# Altium PCB PCB.PcbDoc (part 2 of 2)
Units mm, origin at the board's own origin, x right, y up, seen from the top; angles counter-clockwise.
Board outline 82 x 200 mm, 4 copper layers (Top Layer, Signal Layer 1, Signal Layer 2, Bottom Layer), stack 0.778 mm thick; 206 components, 124 nets, 689 pads, 384 vias.
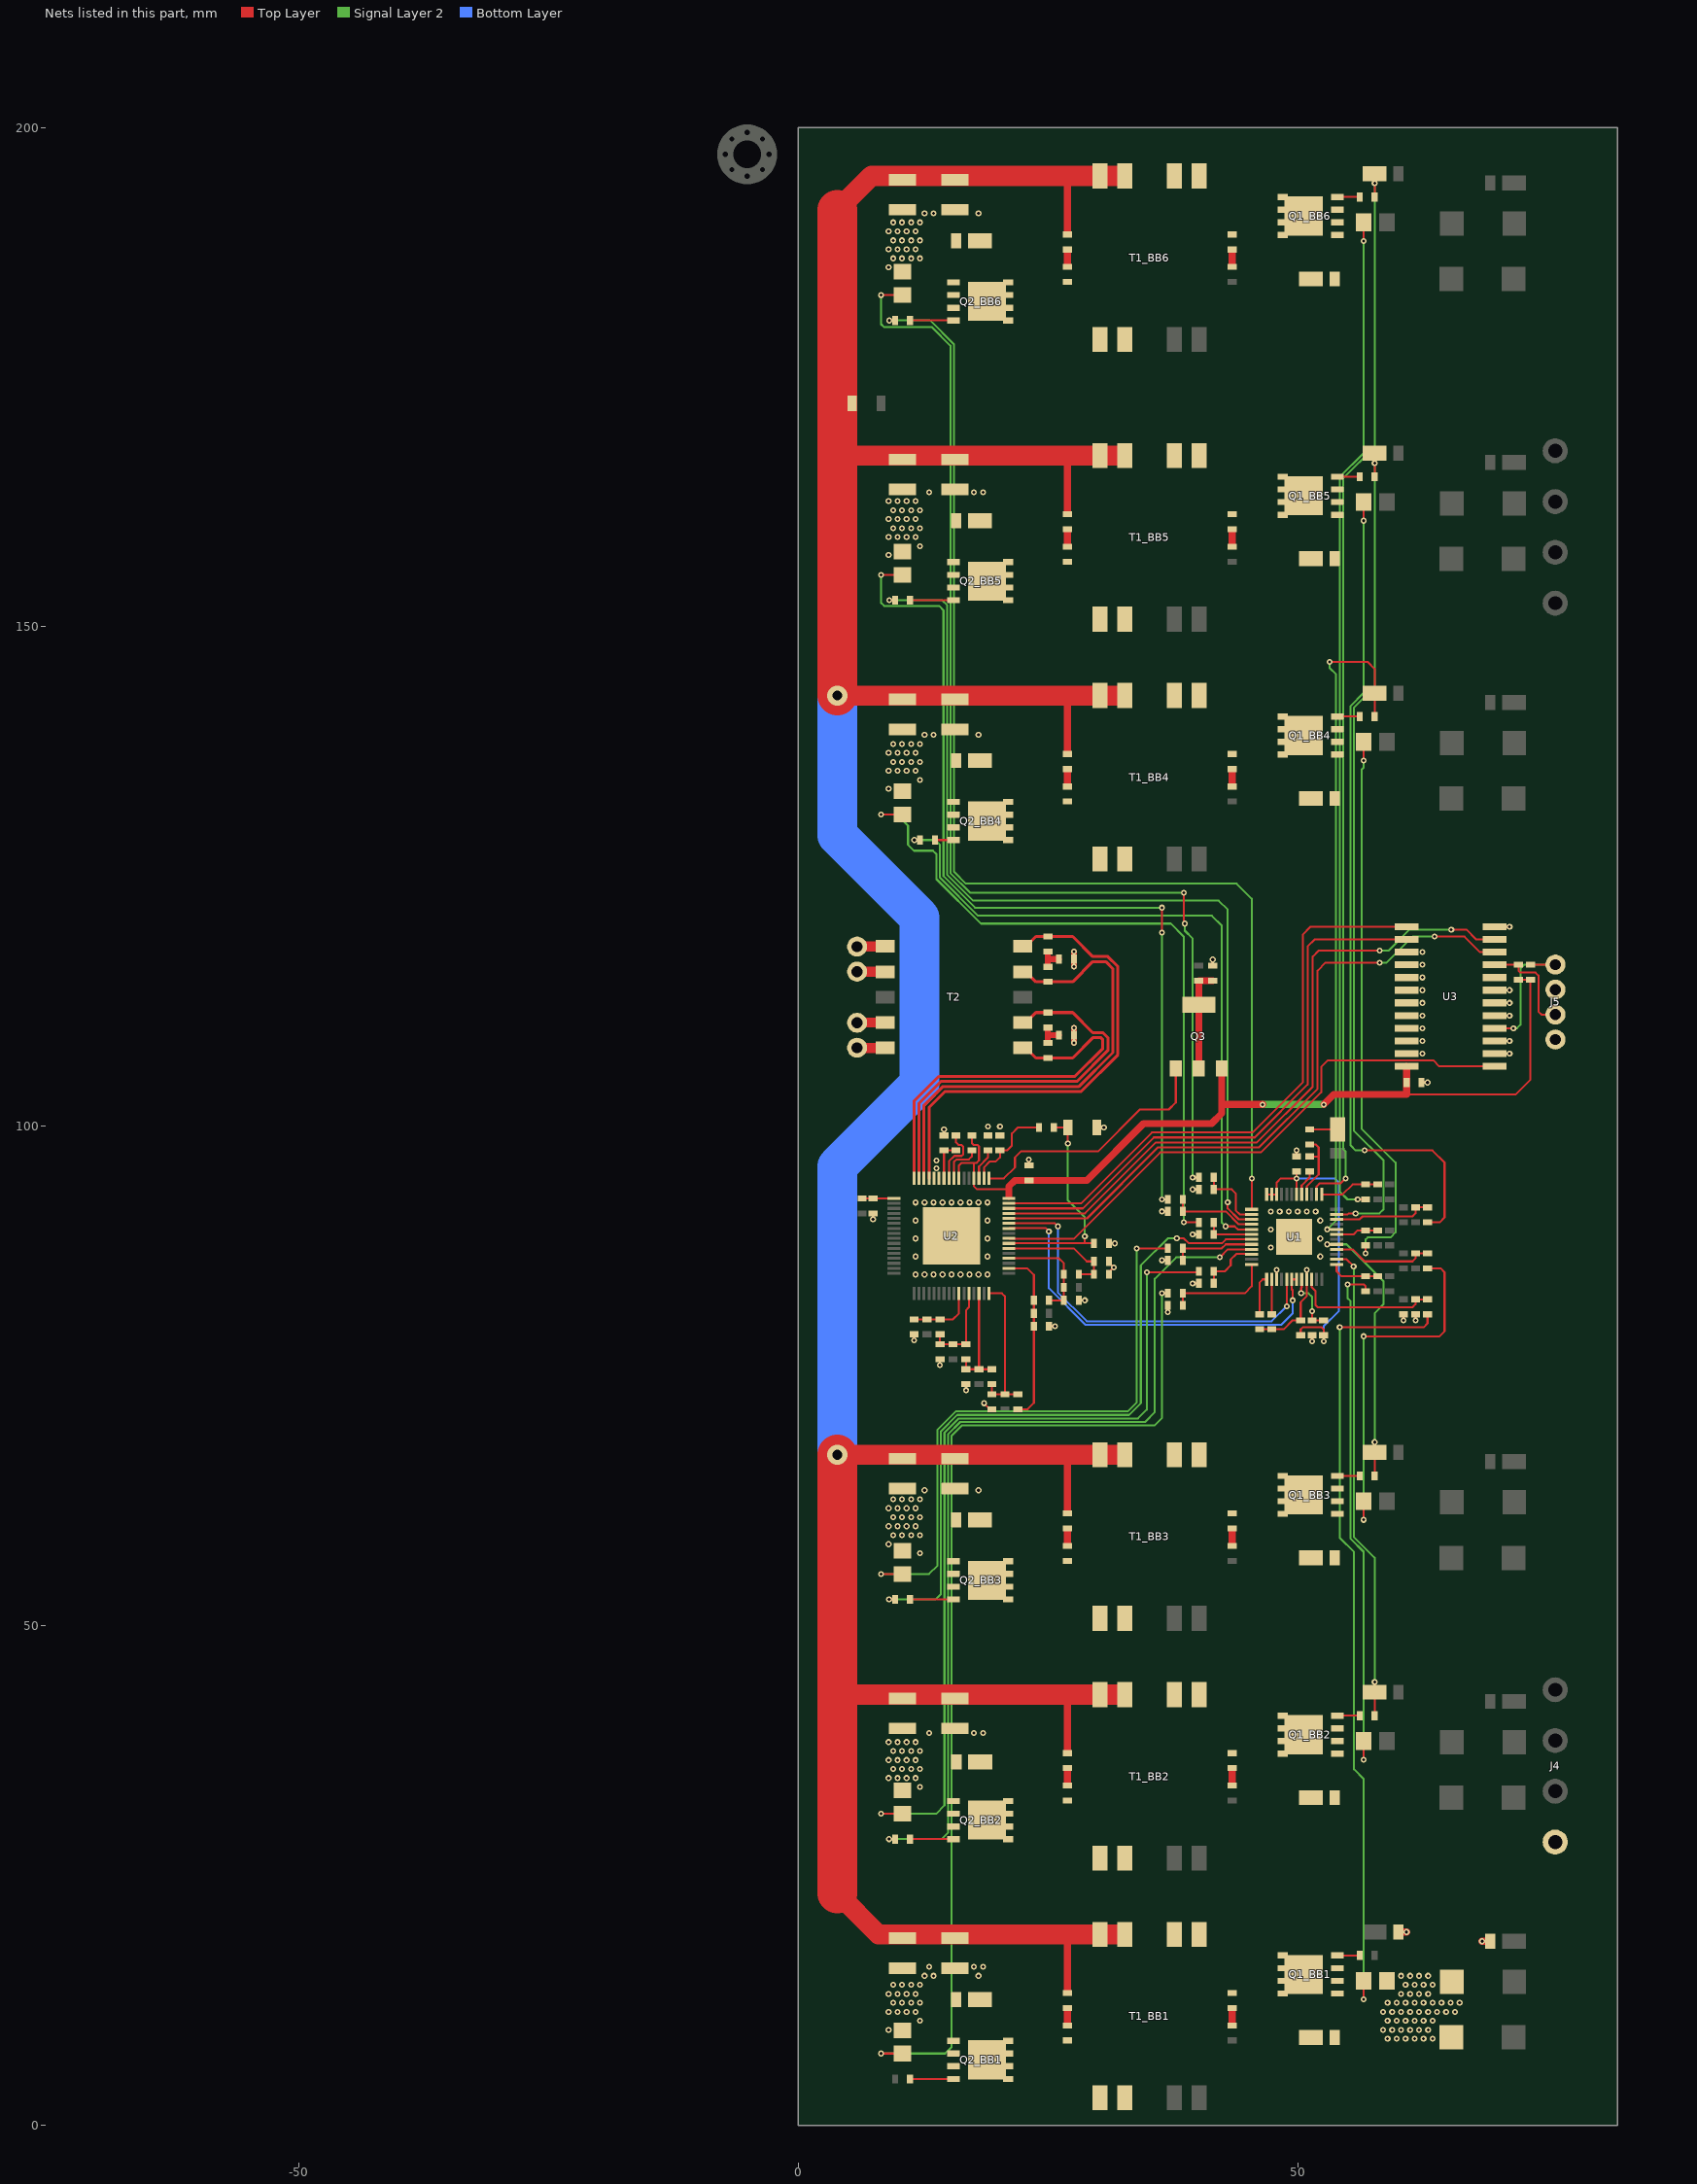
[diagram p4: the nets of this part, all layers, seen from the top]

## Via types
v1: diameter 0.6, hole 0.3, Top Layer to Bottom Layer, 371 vias
v2: diameter 2, hole 1, Top Layer to Bottom Layer, 12 vias
v3: diameter 1.27, hole 0.711, Top Layer to Bottom Layer, 1 vias

## Nets (pads, with @x,y where several pads share a name; then routed paths per layer and width w, separated by ;. In a path a pad name is that pad's centre, name@x,y a point inside that pad or via, vN(x,y) a via of type N, cw(c..) or ccw(c..) an arc to the next point about the centre after c; other vN are vias at no path point) (continued)
G2P: D4_BB2.2 R3_BB2.1 U1.26 | length 47.8
  Top Layer w0.2: U1.26@53.9,86.7 54.9,86.7 v1(55.6,86) ; R3_BB2.1@57.7,41.03 D4_BB2.2@57.7,43.375 v1(57.7,44.4)
  Signal Layer 2 w0.2: v1(55.6,86) 55.65,85.95 55.65,58.88 57.7,56.83 v1(57.7,44.4)
G2S: R4_BB2.2 U1.9 | length 92.5
  Top Layer w0.2: v1(9.1,28.67) R4_BB2.2@9.7,28.67 ; v1(42.2,86.9) 43,87.7 U1.9@45.4,87.7
  Signal Layer 2 w0.2: v1(9.1,28.67) 14.37,28.67 15,29.3 15,69.2 15.005,69.2 16.23,70.425 34.725,70.425 35.7,71.4 35.7,84.75 37.85,86.9 v1(42.2,86.9)
G3P: D4_BB3.2 R3_BB3.1 U1.29 | length 27.9
  Top Layer w0.2: v1(52.964,88.2) U1.29@53.9,88.2 ; R3_BB3.1@57.7,65.03 D4_BB3.2@57.7,67.375 v1(57.7,68.4)
  Signal Layer 2 w0.2: v1(52.964,88.2) 54.9,88.2 58.6,84.5 58.6,82.2 57.7,81.3 v1(57.7,68.4)
G3S: R4_BB3.2 U1.7 | length 69.9
  Top Layer w0.2: v1(9.1,52.67) R4_BB3.2@9.7,52.67 ; v1(37.9,88.8) 38.604,88.8 39.05,88.354 39.05,88.35 39.1,88.3 42.405,88.3 42.805,88.7 U1.7@45.4,88.7
  Signal Layer 2 w0.2: v1(9.1,52.67) 13.77,52.67 14.3,53.2 14.3,69.5 14.305,69.5 15.93,71.125 33.125,71.125 34.3,72.3 34.3,86.1 37,88.8 v1(37.9,88.8)
G4P: D4_BB4.2 R3_BB4.1 U1.32 | length 67.9
  Top Layer w0.2: v1(52.964,89.7) U1.32@53.9,89.7 ; v1(53.2,146.5) 57,146.5 57.7,145.8 D4_BB4.2@57.7,143.375 57.7,142.4 R3_BB4.1@57.7,141.03
  Signal Layer 2 w0.2: v1(52.964,89.7) 53.85,90.586 53.85,145.25 53.2,145.9 v1(53.2,146.5)
G4S: R4_BB4.2 U1.5 | length 69.8
  Top Layer w0.2: v1(11.63,128.67) R4_BB4.2@12.2,128.67 ; v1(42.8,90) 43.7,90 44,89.7 U1.5@45.4,89.7
  Signal Layer 2 w0.2: v1(11.63,128.67) 13.73,128.67 14.2,128.2 14.2,124.9 18,121.1 41.4,121.1 42.4,120.1 42.4,90.4 v1(42.8,90)
G5P: D4_BB5.2 R3_BB5.1 U1.35 | length 84
  Top Layer w0.2: U1.35@53.9,91.2 55,91.2 55.1,91.3 v1(55.8,91.3) ; R3_BB5.1@57.7,165.03 v1(57.7,166.4) D4_BB5.2@57.7,167.375
  Signal Layer 2 w0.2: v1(55.8,91.3) 58.2,91.3 58.6,91.7 58.6,96.6 55.65,99.55 55.65,141.945 57.7,143.995 v1(57.7,166.4)
G5S: R4_BB5.2 U1.3 | length 95.8
  Top Layer w0.2: v1(9.13,152.67) R4_BB5.2@9.7,152.67 ; v1(43,92.4) 43,91.8 44.1,90.7 U1.3@45.4,90.7
  Signal Layer 2 w0.2: v1(9.13,152.67) 14.43,152.67 14.9,152.2 14.9,125.21 17.51,122.6 42.1,122.6 43,121.7 v1(43,92.4)
G6P: D4_BB6.2 R3_BB6.1 U1.38 | length 107.4
  Top Layer w0.2: U1.38@51.9,93.2 51.9,94 52.2,94.3 54.3,94.3 v1(54.8,94.8) ; R3_BB6.1@57.7,193.03 v1(57.7,194.4) D4_BB6.2@57.7,195.375
  Signal Layer 2 w0.2: v1(54.8,94.8) 54.8,97.5 54.55,97.75 54.55,164.845 57.7,167.995 v1(57.7,194.4)
G6S: R4_BB6.2 U1.1 | length 122.8
  Top Layer w0.2: v1(9.13,180.67) R4_BB6.2@9.7,180.67 ; U1.1@45.4,91.7 v1(45.4,94.8)
  Signal Layer 2 w0.2: v1(9.13,180.67) 13.23,180.67 15.6,178.3 15.6,125.5 16.8,124.3 43.9,124.3 45.4,122.8 v1(45.4,94.8)
GND: C3_BB1.2 C4_BB1.2 C5_BB1.1 C5_BB2.1 C5_BB3.1 C5_BB4.1 C5_BB5.1 C5_BB6.1 C6_BB1.1 C6_BB2.1 C6_BB3.1 C6_BB4.1 C6_BB5.1 C6_BB6.1 C7_BB1.1 C8_BB1.1 C8_BB2.1 C8_BB3.1 C8_BB4.1 C8_BB5.1 C8_BB6.1 C9_FB1.1 C9_FB2.1 C9_FB3.1 C9_FB4.1 C9_FB5.1 C9_FB6.1 C12.1 C13.2 C16.1 C20.1 C21.2 C22.1 C23.1 C24.1 C25.1 C26.1 C27.1 C28.1 C29.1 D1_BB1.1 D4_BB1.1 J4.1 J5.1 J5.3 R7_BB1.1 R8_BB1.1 R8_BB2.1 R8_BB3.1 R8_BB4.1 R8_BB5.1 R8_BB6.1 R16.1 R17.1 R18.2 R24.1 R25.2 R27.1 U1.15 U1.21 U1.49 U2.59 U2.60 U2.65 U3.2 U3.3 U3.5 U3.6 U3.7 U3.8 U3.12 U3.15 U3.16 U3.17 U3.18 U3.19 U3.20 U3.21 U3.22 U3.23 | length 33.2
  Top Layer w0.2: v1(7.5,90.7) C26.1@7.5,91.3 ; v1(11.6,78.6) C9_FB6.1@11.6,79.2 ; v1(14.2,76.1) C9_FB5.1@14.2,76.7 ; R18.2@14.6,99.1 v1(14.6,99.7) ; v1(16.8,73.6) C9_FB4.1@16.8,74.2 ; v1(18.6,72.3) 19.2,71.7 C9_FB3.1@19.4,71.7 ; C21.2@19,99.1 C21.2@19.1,99.1 ; C25.1@23.1,96.1 v1(23.1,96.7) ; C9_FB2.1@25.1,80 v1(25.7,80) ; C9_FB1.1@28.1,82.6 v1(28.7,82.6) ; R25.2@29.9,99.9 v1(30.6,99.9) ; R27.1@31.1,85.2 31.1,85.4 v1(31.6,85.9) 31.1,86.4 C27.1@31.1,86.5 ; C24.1@31.1,88.3 v1(31.7,88.3) ; v1(36.4,86.6) C8_BB3.1@37,86.6 ; v1(36.4,91.5) C8_BB5.1@37,91.5 ; v1(37,81.4) C8_BB1.1@37,82.1 ; v1(39.5,84.3) C8_BB2.1@40.1,84.3 ; v1(39.5,89.2) C8_BB4.1@40.1,89.2 ; v1(39.5,93.7) C8_BB6.1@40.1,93.7 ; C23.1@41.5,116.1 v1(41.5,116.7) ; R16.1@46.2,79.7 R17.1@47.4,79.7 48.6,79.7 49.5,80.6 C28.1@50.3,80.6 50.3,82.4 50.9,83 U1.21@50.9,84.7 ; C29.1@62.4,104.4 v1(63,104.4) ; U3.12@69.7,119.99 v1(71.21,119.99)
  Top Layer w0.3: U1.15@47.9,84.7 v1(47.9,85.636) ; C13.2@49.9,97 v1(49.9,97.6) ; U1.21@50.9,84.7 v1(50.9,85.636) ; v1(51.45,78.5) R24.1@51.45,79.1 ; v1(60.6,80.6) C20.1@60.6,81.2 ; v1(61.8,80.6) C7_BB1.1@61.8,81.2
  Top Layer w0.6: v1(27.6,108.38) C12.1@27.6,109.13 v1(27.6,109.88) ; v1(27.6,116) C16.1@27.6,116.75 v1(27.6,117.5)
  Top Layer w0.7: D4_BB1.1@60.075,19.375 v1(60.9,19.375) ; v1(68.45,18.45) D1_BB1.1@69.275,18.45
  Top Layer w2: C3_BB1.2@65.42,14.49 65.435,14.475 C3_BB1.2@65.435,14.375
  other v1: 59.004,8.687 59.904,8.687 60.804,8.687 61.704,8.687 62.604,8.687 63.504,8.687 9.054,9.587 58.554,9.587 59.454,9.587 60.354,9.587 61.254,9.587 62.154,9.587 63.054,9.587 12.204,10.487 59.004,10.487 59.904,10.487 60.804,10.487 61.704,10.487 62.604,10.487 63.504,10.487 9.054,11.387 9.954,11.387 10.854,11.387 11.754,11.387 58.554,11.387 59.454,11.387 60.354,11.387 61.254,11.387 62.154,11.387 63.054,11.387 63.954,11.387 64.854,11.387 65.754,11.387 9.504,12.287 10.404,12.287 11.304,12.287 12.204,12.287 59.004,12.287 59.904,12.287 60.804,12.287 61.704,12.287 62.604,12.287 63.504,12.287 64.404,12.287 65.304,12.287 66.204,12.287 9.054,13.187 9.954,13.187 10.854,13.187 11.754,13.187 60.354,13.187 61.254,13.187 62.154,13.187 63.054,13.187 9.504,14.087 10.404,14.087 11.304,14.087 12.204,14.087 60.804,14.087 61.704,14.087 62.604,14.087 63.504,14.087 12.654,14.987 13.554,14.987 18.054,14.987 60.354,14.987 61.254,14.987 62.154,14.987 63.054,14.987 13.104,15.887 17.604,15.887 18.504,15.887 12.204,33.887 9.054,34.787 9.954,34.787 10.854,34.787 11.754,34.787 9.504,35.687 10.404,35.687 11.304,35.687 12.204,35.687 9.054,36.587 9.954,36.587 10.854,36.587 11.754,36.587 9.504,37.487 10.404,37.487 11.304,37.487 12.204,37.487 9.054,38.387 9.954,38.387 10.854,38.387 11.754,38.387 13.104,39.287 17.604,39.287 18.504,39.287 12.204,57.287 9.054,58.187 9.504,59.087 10.404,59.087 11.304,59.087 12.204,59.087 9.054,59.987 9.954,59.987 10.854,59.987 11.754,59.987 9.504,60.887 10.404,60.887 11.304,60.887 12.204,60.887 9.054,61.787 9.954,61.787 10.854,61.787 11.754,61.787 9.504,62.687 10.404,62.687 11.304,62.687 12.204,62.687 12.654,63.587 18.054,63.587 11.754,85.187 12.654,85.187 13.554,85.187 14.454,85.187 15.354,85.187 16.254,85.187 17.154,85.187 18.054,85.187 18.954,85.187 11.754,86.987 18.954,86.987 52.254,86.987 47.304,87.887 11.754,88.787 18.954,88.787 52.254,88.787 47.304,89.687 11.754,90.587 18.954,90.587 52.254,90.587 47.304,91.487 48.204,91.487 49.104,91.487 50.004,91.487 50.904,91.487 51.804,91.487 11.754,92.387 12.654,92.387 13.554,92.387 14.454,92.387 15.354,92.387 16.254,92.387 17.154,92.387 18.054,92.387 18.954,92.387 13.85,95.8 13.85,96.596 19,100 20.2,100 62.5,107.29 71.21,107.29 62.5,108.56 71.21,108.56 62.5,109.83 62.5,111.1 71.21,111.1 62.5,112.37 71.21,112.37 62.5,113.64 71.21,113.64 62.5,114.91 62.5,116.18 62.5,117.45 9.054,133.787 12.204,134.687 9.054,135.587 9.954,135.587 10.854,135.587 11.754,135.587 9.504,136.487 10.404,136.487 11.304,136.487 12.204,136.487 9.054,137.387 9.954,137.387 10.854,137.387 11.754,137.387 9.504,138.287 10.404,138.287 11.304,138.287 12.204,138.287 12.654,139.187 13.554,139.187 18.054,139.187 9.054,157.187 12.204,158.087 9.054,158.987 9.954,158.987 10.854,158.987 11.754,158.987 9.504,159.887 10.404,159.887 11.304,159.887 12.204,159.887 9.054,160.787 9.954,160.787 10.854,160.787 11.754,160.787 9.504,161.687 10.404,161.687 11.304,161.687 12.204,161.687 9.054,162.587 9.954,162.587 10.854,162.587 11.754,162.587 13.104,163.487 17.604,163.487 18.504,163.487 9.054,185.987 9.504,186.887 10.404,186.887 11.304,186.887 12.204,186.887 9.054,187.787 9.954,187.787 10.854,187.787 11.754,187.787 9.504,188.687 10.404,188.687 11.304,188.687 12.204,188.687 9.054,189.587 9.954,189.587 10.854,189.587 11.754,189.587 9.504,190.487 10.404,190.487 11.304,190.487 12.204,190.487 12.654,191.387 13.554,191.387 18.054,191.387
I1P: C7_BB1.2 R5_BB1.1 U1.22 | length 14.7
  Top Layer w0.2: U1.22@51.4,84.7 51.4,83.905 51.8,83.505 51.8,82.1 52,81.9 61.5,81.9 61.8,82.2 C7_BB1.2@61.8,82.7 R5_BB1.1@63,82.7
I1S: C8_BB1.2 R6_BB1.2 U1.12 | length 10.6
  Top Layer w0.2: C8_BB1.2@38.5,82.1 R6_BB1.2@38.5,83.3 44.7,83.3 45.4,84 U1.12@45.4,86.2
I2P: C7_BB2.2 R5_BB2.1 U1.25 | length 5
  Top Layer w0.2: U1.25@53.9,86.2 53.9,85.5 54.4,85 R5_BB2.1@56.8,85 C7_BB2.2@58,85
I2S: C8_BB2.2 R6_BB2.2 U1.10 | length 6.1
  Top Layer w0.2: C8_BB2.2@41.6,84.3 R6_BB2.2@41.6,85.5 42.7,85.5 43.3,86.1 43.3,86.678 43.872,87.25 45.35,87.25 U1.10@45.4,87.2
I3P: C7_BB3.2 R5_BB3.1 U1.28 | length 10.2
  Top Layer w0.2: U1.28@53.9,87.7 55.5,87.7 56.7,86.5 61.5,86.5 61.8,86.8 C7_BB3.2@61.8,87.3 R5_BB3.1@63,87.3
I3S: C8_BB3.2 R6_BB3.2 U1.8 | length 8.3
  Top Layer w0.2: C8_BB3.2@38.5,86.6 R6_BB3.2@38.5,87.8 42.4,87.8 42.8,88.2 U1.8@45.4,88.2
I4P: C7_BB4.2 R5_BB4.1 U1.31 | length 4.3
  Top Layer w0.2: U1.31@53.9,89.2 55.6,89.2 56,89.6 R5_BB4.1@56.8,89.6 C7_BB4.2@58,89.6
I4S: C8_BB4.2 R6_BB4.2 U1.6 | length 5
  Top Layer w0.2: R6_BB4.2@41.6,90.4 C8_BB4.2@41.6,89.2 U1.6@45.4,89.2
I5P: C7_BB5.2 R5_BB5.1 U1.34 | length 9.9
  Top Layer w0.2: U1.34@53.9,90.7 56.2,90.7 56.5,91 61.5,91 61.8,91.3 C7_BB5.2@61.8,91.9 R5_BB5.1@63,91.9
I5S: C8_BB5.2 R6_BB5.2 U1.4 | length 8.6
  Top Layer w0.2: R6_BB5.2@38.5,92.7 C8_BB5.2@38.5,91.5 42.8,91.5 44.1,90.2 U1.4@45.4,90.2
I6P: C7_BB6.2 R5_BB6.1 U1.37 | length 6
  Top Layer w0.2: U1.37@52.4,93.2 54.5,93.2 55.5,94.2 R5_BB6.1@56.8,94.2 C7_BB6.2@58,94.2
I6S: C8_BB6.2 R6_BB6.2 U1.2 | length 7
  Top Layer w0.2: R6_BB6.2@41.6,94.9 C8_BB6.2@41.6,93.7 43.4,93.7 43.8,93.3 43.8,91.6 44.2,91.2 U1.2@45.4,91.2
IMA: R15.2 T2.10 U2.61 | length 48.2
  Top Layer w0.3: U2.61@13.1,94.8 13.1,101.9 14.7,103.5 28.321,103.5 32,107.179 32,116 31,117 29.5,117 27.48,119.02 R15.2@25,119.02 23.8,119.02 22.8,118.02 T2.10@22.5,118.02
IMB: R13.2 T2.7 U2.63 | length 39.9
  Top Layer w0.3: U2.63@12.1,94.8 12.1,102.314 14.286,104.5 27.907,104.5 31,107.593 31,108.9 30.52,109.38 29.5,109.38 27.48,111.4 R13.2@25,111.4 23.8,111.4 22.8,110.4 T2.7@22.5,110.4
IPA: R14.1 T2.9 U2.62 | length 47.4
  Top Layer w0.3: U2.62@12.6,94.8 12.6,102.107 14.493,104 28.114,104 31.5,107.386 31.5,115.793 30.793,116.5 29.5,116.5 27.48,114.48 R14.1@25,114.48 23.8,114.48 T2.9@22.8,115.48 ; T2.9@22.5,115.48 T2.9@22.8,115.48 ; T2.9@22.9,115.48 T2.9@22.8,115.48
IPB: R12.1 T2.6 U2.64 | length 39
  Top Layer w0.3: U2.64@11.6,94.8 11.6,102.521 14.079,105 27.7,105 30.5,107.8 30.5,108.693 30.313,108.88 29.5,108.88 27.48,106.86 R12.1@25,106.86 23.8,106.86 22.8,107.86 T2.6@22.5,107.86
MUX: U2.40 U3.1 | length 57.7
  Top Layer w0.2: U2.40@21.1,88.8 21.15,88.75 27.578,88.75 36.228,97.4 46.328,97.4 52.35,103.422 52.35,105.945 53.025,106.62 63.58,106.62 64.18,106.02 U3.1@69.7,106.02
NetC1_BB1_1: C1_BB1.1 R1_BB1.2 | length 1.3
  Top Layer w0.7: C1_BB1.1@43.45,10.225 R1_BB1.2@43.45,11.575
NetC1_BB2_1: C1_BB2.1 R1_BB2.2 | length 1.3
  Top Layer w0.7: C1_BB2.1@43.45,34.225 R1_BB2.2@43.45,35.575
NetC1_BB3_1: C1_BB3.1 R1_BB3.2 | length 1.3
  Top Layer w0.7: C1_BB3.1@43.45,58.225 R1_BB3.2@43.45,59.575
NetC1_BB4_1: C1_BB4.1 R1_BB4.2 | length 1.3
  Top Layer w0.7: C1_BB4.1@43.45,134.225 R1_BB4.2@43.45,135.575
NetC1_BB5_1: C1_BB5.1 R1_BB5.2 | length 1.3
  Top Layer w0.7: C1_BB5.1@43.45,158.225 R1_BB5.2@43.45,159.575
NetC1_BB6_1: C1_BB6.1 R1_BB6.2 | length 1.3
  Top Layer w0.7: C1_BB6.1@43.45,186.225 R1_BB6.2@43.45,187.575
NetC2_BB1_1: C2_BB1.1 R2_BB1.2 | length 1.3
  Top Layer w0.7: R2_BB1.2@26.95,10.275 C2_BB1.1@26.95,11.575
NetC2_BB1_2: C2_BB1.2 C2_BB2.2 C2_BB3.2 C2_BB4.2 C2_BB5.2 C2_BB6.2 C5_BB1.2 C5_BB2.2 C5_BB3.2 C5_BB4.2 C5_BB5.2 C5_BB6.2 C6_BB1.2 C6_BB2.2 C6_BB3.2 C6_BB4.2 C6_BB5.2 C6_BB6.2 R10.2 T1_BB1.6 T1_BB1.7 T1_BB2.6 T1_BB2.7 T1_BB3.6 T1_BB3.7 T1_BB4.6 T1_BB4.7 T1_BB5.6 T1_BB5.7 T1_BB6.6 T1_BB6.7 | length 381.8
  Top Layer w0.7: 26.925,19.175 26.95,19.15 26.95,19.135 C2_BB1.2@26.95,13.475 ; 26.925,43.175 26.95,43.15 26.95,43.135 C2_BB2.2@26.95,37.475 ; 26.925,67.175 26.95,67.15 26.95,67.135 C2_BB3.2@26.95,61.475 ; 26.925,143.175 26.95,143.15 26.95,143.135 C2_BB4.2@26.95,137.475 ; 26.925,167.175 26.95,167.15 26.95,167.135 C2_BB5.2@26.95,161.475 ; C2_BB6.2@26.95,189.475 26.95,195.135
  Top Layer w2: 3.925,23.25 8.04,19.135 26.95,19.135 T1_BB1.6@30.22,19.135 T1_BB1.7@32.2,19.135 ; v2(3.925,67.135) 10.45,67.135 15.7,67.135 26.95,67.135 T1_BB3.6@30.22,67.135 T1_BB3.7@32.2,67.135 ; v2(3.925,143.135) 10.45,143.135 15.7,143.135 26.95,143.135 T1_BB4.6@30.22,143.135 T1_BB4.7@32.2,143.135 ; 3.925,167.135 10.45,167.135 15.7,167.135 26.95,167.135 T1_BB5.6@30.22,167.135 T1_BB5.7@32.2,167.135 ; 3.925,191.725 7.335,195.135 26.95,195.135 T1_BB6.6@30.22,195.135 T1_BB6.7@32.2,195.135 ; 4.375,43.135 10.45,43.135 15.7,43.135 26.95,43.135 T1_BB2.6@30.22,43.135 T1_BB2.7@32.2,43.135
  Top Layer w4: 3.925,23.25 v2(3.925,67.135) ; v2(3.925,143.135) 3.925,167.135 3.925,191.725
  Bottom Layer w4: v2(3.925,67.135) 3.925,96.025 12.15,104.25 12.15,120.925 3.925,129.15 v2(3.925,143.135)
NetC2_BB2_1: C2_BB2.1 R2_BB2.2 | length 1.3
  Top Layer w0.7: R2_BB2.2@26.95,34.275 C2_BB2.1@26.95,35.575
NetC2_BB3_1: C2_BB3.1 R2_BB3.2 | length 1.3
  Top Layer w0.7: R2_BB3.2@26.95,58.275 C2_BB3.1@26.95,59.575
NetC2_BB4_1: C2_BB4.1 R2_BB4.2 | length 1.3
  Top Layer w0.7: R2_BB4.2@26.95,134.275 C2_BB4.1@26.95,135.575
NetC2_BB5_1: C2_BB5.1 R2_BB5.2 | length 1.3
  Top Layer w0.7: R2_BB5.2@26.95,158.275 C2_BB5.1@26.95,159.575
NetC2_BB6_1: C2_BB6.1 R2_BB6.2 | length 1.3
  Top Layer w0.7: R2_BB6.2@26.95,186.275 C2_BB6.1@26.95,187.575
NetC9_FB1_2: C9_FB1.2 C10_FB1.2 C10_FB2.1 R9_FB1.2 U2.36 | length 10.9
  Top Layer w0.2: U2.36@21.1,86.8 26.1,86.8 26.6,86.3 C10_FB1.2@26.6,85.2 R9_FB1.2@26.6,83.9 C9_FB1.2@26.6,82.6 C10_FB2.1@25.1,82.6
NetC9_FB2_2: C9_FB2.2 C10_FB2.2 C10_FB3.1 R9_FB2.2 U2.34 | length 17.4
  Top Layer w0.2: U2.34@21.1,85.8 22.936,85.8 23.6,85.136 C10_FB2.2@23.6,82.6 R9_FB2.2@23.6,81.3 C9_FB2.2@23.6,80 23.6,72.325 22.975,71.7 C10_FB3.1@22,71.7
NetC9_FB3_2: C9_FB3.2 C10_FB3.2 C10_FB4.1 R9_FB3.2 U2.32 | length 15.1
  Top Layer w0.2: U2.32@19.1,83.3 20.4,83.3 20.7,83 R9_FB3.2@20.7,73.2 ; C10_FB4.1@19.4,74.2 C9_FB3.2@19.4,73.2 R9_FB3.2@20.7,73.2 ; C10_FB3.2@22,73.2 R9_FB3.2@20.7,73.2
NetC9_FB4_2: C9_FB4.2 C10_FB4.2 C10_FB5.1 R9_FB4.2 U2.30 | length 11.2
  Top Layer w0.2: C10_FB5.1@16.8,76.7 C9_FB4.2@16.8,75.7 R9_FB4.2@18.1,75.7 ; U2.30@18.1,83.3 R9_FB4.2@18.1,75.7 ; C10_FB4.2@19.4,75.7 R9_FB4.2@18.1,75.7
NetC9_FB5_2: C9_FB5.2 C10_FB5.2 C10_FB6.1 R9_FB5.2 U2.28 | length 8.8
  Top Layer w0.2: C10_FB6.1@14.2,79.2 C9_FB5.2@14.2,78.2 R9_FB5.2@15.5,78.2 C10_FB5.2@16.8,78.2 16.8,81.6 17.1,81.9 U2.28@17.1,83.3
NetC9_FB6_2: C9_FB6.2 C10_FB6.2 R9_FB6.2 U2.26 | length 6.7
  Top Layer w0.2: C9_FB6.2@11.6,80.7 R9_FB6.2@12.9,80.7 C10_FB6.2@14.2,80.7 15.5,80.7 16.1,81.3 U2.26@16.1,83.3
NetC10_FB1_1: C10_FB1.1 C27.2 R27.2 U2.38 | length 11.8
  Top Layer w0.2: U2.38@21.1,87.8 27.6,87.8 28.9,86.5 C27.2@29.6,86.5 R27.2@29.6,85.2 C10_FB1.1@28.1,85.2
NetC11_1: C11.1 U1.41 | length 2.6
  Top Layer w0.2: U1.41@50.4,93.2 50.4,94.1 51.2,94.9 C11.1@51.2,95.5
NetC11_2: C11.2 R11.1 U1.40 | length 7.1
  Top Layer w0.2: U1.40@50.9,93.2 50.9,94 52.1,95.2 52.1,97 ; C11.2@51.2,97 52.1,97 ; R11.1@51.2,98.2 51.8,98.2 52.1,97.9 52.1,97
NetC12_2: C12.2 R12.2 R13.1 | length 2.6
  Top Layer w0.6: R12.2@25,108.36 25,109.13 ; R13.1@25,109.9 25,109.13 ; C12.2@26.1,109.13 25,109.13
NetC16_2: C16.2 R14.2 R15.1 | length 2.6
  Top Layer w0.6: R14.2@25,115.98 25,116.75 ; R15.1@25,117.52 25,116.75 ; C16.2@26.1,116.75 25,116.75
NetC21_1: C21.1 U2.51 | length 3.2
  Top Layer w0.2: U2.51@18.1,94.8 18.1,96 19,96.9 C21.1@19,97.6
NetC23_2: C23.2 Q3.2 R20.1 | length 10
  Top Layer w0.7: Q3.2@40.1,105.8 Q3.2@40.1,112.2 R20.1@40.1,114.4 ; R20.1@40.1,114.6 C23.2@41.5,114.6
NetC26_2: C26.2 R26.2 U2.1 | length 3.2
  Top Layer w0.2: R26.2@6.4,92.8 C26.2@7.5,92.8 U2.1@9.6,92.8
NetD2_BB1_1: D2_BB1.1 Q1_BB1.1 Q1_BB1.2 Q1_BB1.3 R5_BB1.2 R7_BB1.2 | length 80
  Top Layer w0.2: v1(54.2,79.9) 62.6,79.9 63,80.3 R5_BB1.2@63,81.2 ; v1(56.6,12.625) R7_BB1.2@56.6,14.49
  Signal Layer 2 w0.2: v1(54.2,79.9) 54.2,58.845 55.65,57.395 55.65,35.655 56.6,34.705 v1(56.6,12.625)
NetD2_BB1_2: D2_BB1.2 Q1_BB1.5 Q1_BB1.6 Q1_BB1.7 Q1_BB1.8 R1_BB1.1 T1_BB1.9 T1_BB1.10
NetD2_BB2_1: D2_BB2.1 Q1_BB2.1 Q1_BB2.2 Q1_BB2.3 R5_BB2.2 R7_BB2.2 | length 52.5
  Top Layer w0.2: v1(55,84.2) 56.6,84.2 56.8,84 R5_BB2.2@56.8,83.5 ; v1(56.6,36.625) R7_BB2.2@56.6,38.49
  Signal Layer 2 w0.2: v1(55,84.2) 55,82.8 55.3,82.5 55.3,58.735 56.6,57.435 v1(56.6,36.625)
NetD2_BB2_2: D2_BB2.2 Q1_BB2.5 Q1_BB2.6 Q1_BB2.7 Q1_BB2.8 R1_BB2.1 T1_BB2.9 T1_BB2.10
NetD2_BB3_1: D2_BB3.1 Q1_BB3.1 Q1_BB3.2 Q1_BB3.3 R5_BB3.2 R7_BB3.2 | length 36.3
  Top Layer w0.2: v1(56.6,60.625) R7_BB3.2@56.6,62.49 ; v1(56.6,79) 64.2,79 64.7,79.5 64.7,85.4 64.3,85.8 R5_BB3.2@63,85.8
  Signal Layer 2 w0.2: v1(56.6,60.625) v1(56.6,79)
NetD2_BB3_2: D2_BB3.2 Q1_BB3.5 Q1_BB3.6 Q1_BB3.7 Q1_BB3.8 R1_BB3.1 T1_BB3.9 T1_BB3.10
NetD2_BB4_1: D2_BB4.1 Q1_BB4.1 Q1_BB4.2 Q1_BB4.3 R5_BB4.2 R7_BB4.2 | length 56.1
  Top Layer w0.2: v1(56.6,136.625) R7_BB4.2@56.6,138.49 ; v1(56.8,87.3) R5_BB4.2@56.8,88.1
  Signal Layer 2 w0.2: v1(56.6,136.625) 56.6,135.9 56.4,135.7 56.4,99.79 59.8,96.39 59.8,89.4 59.3,88.9 57,88.9 56.8,88.7 v1(56.8,87.3)
NetD2_BB4_2: D2_BB4.2 Q1_BB4.5 Q1_BB4.6 Q1_BB4.7 Q1_BB4.8 R1_BB4.1 T1_BB4.9 T1_BB4.10
NetD2_BB5_1: D2_BB5.1 Q1_BB5.1 Q1_BB5.2 Q1_BB5.3 R5_BB5.2 R7_BB5.2 | length 82.4
  Top Layer w0.2: v1(56.6,160.625) R7_BB5.2@56.6,162.49 ; v1(56.7,97.6) 63.5,97.6 64.7,96.4 64.7,90.9 64.2,90.4 R5_BB5.2@63,90.4
  Signal Layer 2 w0.2: v1(56.6,160.625) 56.6,143.39 55.3,142.09 55.3,99 55.3,98.1 55.8,97.6 v1(56.7,97.6)
NetD2_BB5_2: D2_BB5.2 Q1_BB5.5 Q1_BB5.6 Q1_BB5.7 Q1_BB5.8 R1_BB5.1 T1_BB5.9 T1_BB5.10
NetD2_BB6_1: D2_BB6.1 Q1_BB6.1 Q1_BB6.2 Q1_BB6.3 R5_BB6.2 R7_BB6.2 | length 100.9
  Top Layer w0.2: v1(56,92.7) R5_BB6.2@56.8,92.7 ; v1(56.6,188.625) R7_BB6.2@56.6,190.49
  Signal Layer 2 w0.2: v1(56,92.7) 55,92.7 54.2,93.5 54.2,164.99 56.6,167.39 v1(56.6,188.625)
NetD2_BB6_2: D2_BB6.2 Q1_BB6.5 Q1_BB6.6 Q1_BB6.7 Q1_BB6.8 R1_BB6.1 T1_BB6.9 T1_BB6.10
NetD3_BB1_1: D3_BB1.1 Q2_BB1.1 Q2_BB1.2 Q2_BB1.3 R6_BB1.1 R8_BB1.2 | length 105.5
  Top Layer w0.2: v1(8.3,7.21) R8_BB1.2@10.45,7.21 ; v1(36.4,83.3) R6_BB1.1@37,83.3
  Signal Layer 2 w0.2: v1(8.3,7.21) 14.71,7.21 15.35,7.85 15.35,69.05 15.355,69.05 16.38,70.075 35.675,70.075 36.4,70.8 v1(36.4,83.3)
NetD3_BB1_2: D3_BB1.2 Q2_BB1.5 Q2_BB1.6 Q2_BB1.7 Q2_BB1.8 R2_BB1.1 T1_BB1.4 T1_BB1.5
NetD3_BB2_1: D3_BB2.1 Q2_BB2.1 Q2_BB2.2 Q2_BB2.3 R6_BB2.1 R8_BB2.2 | length 86.3
  Top Layer w0.2: v1(8.3,31.21) R8_BB2.2@10.45,31.21 ; v1(34.9,85.4) 40,85.4 R6_BB2.1@40.1,85.5
  Signal Layer 2 w0.2: v1(8.3,31.21) 13.81,31.21 14.65,32.05 14.65,69.35 14.655,69.35 16.08,70.775 34.025,70.775 34.9,71.65 v1(34.9,85.4)
NetD3_BB2_2: D3_BB2.2 Q2_BB2.5 Q2_BB2.6 Q2_BB2.7 Q2_BB2.8 R2_BB2.1 T1_BB2.4 T1_BB2.5
NetD3_BB3_1: D3_BB3.1 Q2_BB3.1 Q2_BB3.2 Q2_BB3.3 R6_BB3.1 R8_BB3.2 | length 61.3
  Top Layer w0.2: v1(8.3,55.21) R8_BB3.2@10.45,55.21 ; v1(33.9,87.8) R6_BB3.1@37,87.8
  Signal Layer 2 w0.2: v1(8.3,55.21) 13.11,55.21 13.95,56.05 13.95,69.65 13.955,69.65 15.78,71.475 32.98,71.475 33.9,72.395 v1(33.9,87.8)
NetD3_BB3_2: D3_BB3.2 Q2_BB3.5 Q2_BB3.6 Q2_BB3.7 Q2_BB3.8 R2_BB3.1 T1_BB3.4 T1_BB3.5
NetD3_BB4_1: D3_BB4.1 Q2_BB4.1 Q2_BB4.2 Q2_BB4.3 R6_BB4.1 R8_BB4.2 | length 70.2
  Top Layer w0.2: v1(8.3,131.21) R8_BB4.2@10.45,131.21 ; v1(38.6,90.4) R6_BB4.1@40.1,90.4
  Signal Layer 2 w0.2: v1(8.3,131.21) 9.89,131.21 11,130.1 11,128.2 11.6,127.6 13.5,127.6 13.85,127.25 13.85,124.75 18.3,120.3 37.3,120.3 38.6,119 v1(38.6,90.4)
NetD3_BB4_2: D3_BB4.2 Q2_BB4.5 Q2_BB4.6 Q2_BB4.7 Q2_BB4.8 R2_BB4.1 T1_BB4.4 T1_BB4.5
NetD3_BB5_1: D3_BB5.1 Q2_BB5.1 Q2_BB5.2 Q2_BB5.3 R6_BB5.1 R8_BB5.2 | length 91.1
  Top Layer w0.2: v1(8.3,155.21) R8_BB5.2@10.45,155.21 ; v1(36.4,92.7) R6_BB5.1@37,92.7 ; v1(36.4,119.4) v1(36.4,121.9)
  Signal Layer 2 w0.2: v1(8.3,155.21) 8.3,152.4 8.6,152.1 14.1,152.1 14.55,151.65 14.55,125.055 17.705,121.9 v1(36.4,121.9) ; v1(36.4,92.7) v1(36.4,119.4)
NetD3_BB5_2: D3_BB5.2 Q2_BB5.5 Q2_BB5.6 Q2_BB5.7 Q2_BB5.8 R2_BB5.1 T1_BB5.4 T1_BB5.5
NetD3_BB6_1: D3_BB6.1 Q2_BB6.1 Q2_BB6.2 Q2_BB6.3 R6_BB6.1 R8_BB6.2 | length 119.3
  Top Layer w0.2: v1(8.3,183.2) 10.44,183.2 R8_BB6.2@10.45,183.21 ; v1(38.6,123.4) 38.6,120.4 v1(38.7,120.3) ; v1(39.5,94.9) R6_BB6.1@40.1,94.9
  Signal Layer 2 w0.2: v1(8.3,183.2) 8.3,180.3 8.6,180 13.405,180 15.25,178.155 15.25,125.355 17.205,123.4 v1(38.6,123.4) ; v1(38.7,120.3) 38.7,119.6 39.5,118.8 v1(39.5,94.9)
NetD3_BB6_2: D3_BB6.2 Q2_BB6.5 Q2_BB6.6 Q2_BB6.7 Q2_BB6.8 R2_BB6.1 T1_BB6.4 T1_BB6.5
NetD5_2: D5.2 R11.2 | length 2.8
  Top Layer w0.2: R11.2@51.2,99.7 D5.2@54,99.7
NetJ1_1: J1.1 T2.1 | length 2.8
  Top Layer w1: J1.1@5.9,118 5.92,118.02 T2.1@8.71,118.02
NetJ1_2: J1.2 T2.2 | length 2.8
  Top Layer w1: J1.2@5.9,115.5 5.92,115.48 T2.2@8.71,115.48
NetJ2_1: J2.1 T2.4 | length 2.8
  Top Layer w1: J2.1@5.9,110.38 5.92,110.4 T2.4@8.71,110.4
NetJ2_2: J2.2 T2.5 | length 2.8
  Top Layer w1: J2.2@5.9,107.88 5.92,107.86 T2.5@8.71,107.86
NetQ1_BB1_4: Q1_BB1.4 R3_BB1.2 | length 2.2
  Top Layer w0.2: Q1_BB1.4@53.96,17.03 R3_BB1.2@56.2,17.03
NetQ1_BB2_4: Q1_BB2.4 R3_BB2.2 | length 2.2
  Top Layer w0.2: Q1_BB2.4@53.96,41.03 R3_BB2.2@56.2,41.03
NetQ1_BB3_4: Q1_BB3.4 R3_BB3.2 | length 2.2
  Top Layer w0.2: Q1_BB3.4@53.96,65.03 R3_BB3.2@56.2,65.03
NetQ1_BB4_4: Q1_BB4.4 R3_BB4.2 | length 2.2
  Top Layer w0.2: Q1_BB4.4@53.96,141.03 R3_BB4.2@56.2,141.03
NetQ1_BB5_4: Q1_BB5.4 R3_BB5.2 | length 2.2
  Top Layer w0.2: Q1_BB5.4@53.96,165.03 R3_BB5.2@56.2,165.03
NetQ1_BB6_4: Q1_BB6.4 R3_BB6.2 | length 2.2
  Top Layer w0.2: Q1_BB6.4@53.96,193.03 R3_BB6.2@56.2,193.03
NetQ2_BB1_4: Q2_BB1.4 R4_BB1.1 | length 4.3
  Top Layer w0.2: R4_BB1.1@11.2,4.67 Q2_BB1.4@15.54,4.67
NetQ2_BB2_4: Q2_BB2.4 R4_BB2.1 | length 4.3
  Top Layer w0.2: R4_BB2.1@11.2,28.67 Q2_BB2.4@15.54,28.67
NetQ2_BB3_4: Q2_BB3.4 R4_BB3.1 | length 4.3
  Top Layer w0.2: R4_BB3.1@11.2,52.67 Q2_BB3.4@15.54,52.67
NetQ2_BB4_4: Q2_BB4.4 R4_BB4.1 | length 1.8
  Top Layer w0.2: R4_BB4.1@13.7,128.67 Q2_BB4.4@15.54,128.67
NetQ2_BB5_4: Q2_BB5.4 R4_BB5.1 | length 4.3
  Top Layer w0.2: R4_BB5.1@11.2,152.67 Q2_BB5.4@15.54,152.67
NetQ2_BB6_4: Q2_BB6.4 R4_BB6.1 | length 4.3
  Top Layer w0.2: R4_BB6.1@11.2,180.67 Q2_BB6.4@15.54,180.67
NetQ3_1: Q3.1 U2.49 | length 25.8
  Top Layer w0.2: U2.49@19.1,94.8 20.6,94.8 21.7,95.9 21.7,96.9 22.3,97.5 30,97.5 34.2,101.7 37.1,101.7 37.8,102.4 Q3.1@37.8,105.8
NetR16_2: R16.2 U1.13 | length 4
  Top Layer w0.2: R16.2@46.2,81.2 46.2,84.4 46.5,84.7 U1.13@46.9,84.7
NetR17_2: R17.2 U1.14 | length 3.5
  Top Layer w0.2: R17.2@47.4,81.2 U1.14@47.4,84.7
NetR18_1: R18.1 R19.2 U2.58 | length 4
  Top Layer w0.2: U2.58@14.6,94.8 R18.1@14.6,97.6 R19.2@15.8,97.6
NetR19_1: R19.1 U2.57 | length 5.8
  Top Layer w0.2: U2.57@15.1,94.8 15.1,96.5 15.65,97.05 16.354,97.05 16.5,97.196 16.5,98.004 16.354,98.15 16.05,98.15 15.8,98.4 R19.1@15.8,99.1
NetR21_1: R21.1 U2.56 | length 4.3
  Top Layer w0.2: U2.56@15.6,94.8 15.6,96.45 15.85,96.7 17.1,96.7 17.4,97 R21.1@17.4,97.6
NetR22_1: R22.1 R24.2 U1.20 | length 6.2
  Top Layer w0.2: v1(50.35,83.3) 50.35,83.855 50.4,83.905 U1.20@50.4,84.7 ; v1(51.45,81.5) R24.2@51.45,80.6 R22.1@52.6,80.6
  Signal Layer 2 w0.2: v1(50.35,83.3) 51.1,83.3 51.45,82.95 v1(51.45,81.5)
SCKM: U1.17 U2.43 | length 39
  Top Layer w0.2: U2.43@21.1,90.3 25.7,90.3 v1(26,90) ; v1(48.9,82) U1.17@48.9,84.7
  Bottom Layer w0.2: v1(26,90) 26,83.4 28.9,80.5 47.4,80.5 v1(48.9,82)
SDIOM: U1.18 U1.19 U2.42 | length 40.2
  Top Layer w0.2: U2.42@21.1,89.8 21.15,89.85 24.75,89.85 v1(25.1,89.5) ; v1(49.5,82.6) 49.5,83.6 49.4,83.7 U1.18@49.4,84.7 U1.19@49.9,84.7
  Bottom Layer w0.2: v1(25.1,89.5) 25.1,83.805 28.755,80.15 48.35,80.15 49.5,81.3 v1(49.5,82.6)
SEL0: U2.44 U3.10 | length 67.8
  Top Layer w0.2: U2.44@21.1,90.8 28.921,90.8 36.021,97.9 46.121,97.9 52,103.779 52,115.6 52.8,116.4 v1(58.2,116.4) ; v1(63.7,119) 66.7,119 68.25,117.45 U3.10@69.7,117.45
  Signal Layer 2 w0.2: v1(58.2,116.4) 58.9,116.4 61.5,119 v1(63.7,119)
SEL1: U2.45 U3.11 | length 68.4
  Top Layer w0.2: U2.45@21.1,91.3 28.714,91.3 35.814,98.4 45.914,98.4 51.5,103.986 51.5,117 52.1,117.6 v1(58.2,117.6) ; v1(65.375,119.7) 66.9,119.7 67.88,118.72 U3.11@69.7,118.72
  Signal Layer 2 w0.2: v1(58.2,117.6) 59.1,117.6 61.2,119.7 v1(65.375,119.7)
SEL2: U2.46 U3.14 | length 59
  Top Layer w0.2: U2.46@21.1,91.8 28.507,91.8 35.607,98.9 45.707,98.9 51,104.193 51,118 51.72,118.72 U3.14@60.9,118.72
SEL3: U2.47 U3.13 | length 59.9
  Top Layer w0.2: U2.47@21.1,92.3 28.3,92.3 35.4,99.4 45.5,99.4 50.5,104.4 50.5,119.2 51.29,119.99 U3.13@60.9,119.99
TB1: J5.2 R28.1 U3.9 | length 10.6
  Top Layer w0.2: U3.9@69.7,116.18 R28.1@72.1,116.18 72.1,115.6 72.3,115.4 73.8,115.4 74.1,115.1 74.1,111.5 74.4,111.2 J5.2@75.8,111.2
TB2: J5.4 R29.1 U3.4 | length 14.5
  Top Layer w0.2: U3.4@69.7,109.83 v1(71.6,109.83) ; R29.1@73.3,116.18 75.78,116.18 J5.4@75.8,116.2
  Signal Layer 2 w0.2: v1(71.6,109.83) 71.95,109.83 72.3,110.18 72.3,115.8 72.7,116.2 J5.4@75.8,116.2
TEMP: C24.2 R23.1 R25.1 U2.39 | length 22.2
  Top Layer w0.2: U2.39@21.1,88.3 28.7,88.3 ; R23.1@25.6,99.9 R25.1@27,99.9 v1(27,98.282) ; v1(28.7,89) 28.7,88.3 ; C24.2@29.6,88.3 28.7,88.3
  Signal Layer 2 w0.2: v1(27,98.282) 27,92.6 28.7,90.9 v1(28.7,89)
VREF2: C22.2 R23.2 U2.50 | length 9.4
  Top Layer w0.2: U2.50@18.6,94.8 18.6,95.9 19.2,96.5 19.8,96.5 20.2,96.9 C22.2@20.2,97.6 20.9,97.6 21.4,98.1 21.4,99.3 22,99.9 R23.2@24.1,99.9
VREG1: C25.2 C29.2 Q3.3 R21.2 R28.2 R29.2 U2.48 U2.52 U2.55 U3.24 | length 88.4
  Top Layer w0.2: U2.55@16.1,94.8 16.1,96.1 16.35,96.35 17.6,96.35 ; R21.2@17.4,99.1 17.4,98.3 17.55,98.15 17.954,98.15 18.1,98.004 18.1,96.596 17.854,96.35 17.6,96.35 ; 21.1,94 20.8,93.7 17.9,93.7 17.6,94 U2.52@17.6,94.8 17.6,96.35 ; 60.9,103.2 71.8,103.2 73.3,104.7 R29.2@73.3,114.68 R28.2@72.1,114.68
  Top Layer w0.7: 21.1,93 21.1,94 21.7,94.6 C25.2@23.1,94.6 28.9,94.6 34.6,100.3 41.4,100.3 42.4,101.3 42.4,102.2 ; Q3.3@42.4,105.8 42.4,102.2 ; v1(46.5,102.2) 42.4,102.2 ; v1(52.6,102.2) 53.6,103.2 60.9,103.2 C29.2@60.9,104.4 U3.24@60.9,106.02
  Signal Layer 2 w0.7: v1(46.5,102.2) v1(52.6,102.2)
VREG2: C13.1 C28.2 R22.2 U1.42 U1.46 U1.47 U1.48 | length 31.8
  Top Layer w0.2: U1.48@46.9,93.2 U1.47@47.4,93.2 U1.46@47.9,93.2 47.9,94.4 48.3,94.8 v1(49.9,94.8) ; U1.42@49.9,93.2 v1(49.9,94.8) ; C13.1@49.9,95.5 v1(49.9,94.8) ; C28.2@50.3,79.1 50.3,79.7 50.5,79.9 52.4,79.9 52.6,79.7 R22.2@52.6,79.1 v1(52.6,78.5)
  Bottom Layer w0.2: v1(49.9,94.8) 53.7,94.8 54.1,94.4 54.1,81.5 52.6,80 v1(52.6,78.5)
pads on no net: J3.4 T2.3 T2.8 U1.43 U1.44 U1.45 U2.2 U2.3 U2.4 U2.5 U2.6 U2.7 U2.8 U2.9 U2.10 U2.11 U2.12 U2.13 U2.14 U2.15 U2.16 U2.17 U2.18 U2.19 U2.20 U2.21 U2.22 U2.23 U2.24 U2.25 U2.27 U2.29 U2.31 U2.33 U2.35 U2.37 U2.53 U2.54

## Polygon pours and split planes (outlines as drawn)
GND on Top Layer (solid, pour order 168): 19.7,93.4 19.7,84.7 11,84.7 11,93.4
GND on Top Layer (solid, pour order 164): 46.7,85.8 52.6,85.8 52.6,92 46.7,92
no net on Top Layer (solid, pour order 162): 46.9,91.8
NetD2_BB6_2 on Top Layer "Top Layer-NetD2_BB1_2" (solid, pour order 160): 52.5,184.025 52.5,196.425 36.9,196.425 36.9,189.025 45.2,189.025 45.2,184.025
NetD3_BB6_1 on Top Layer "Top Layer-NetD3_BB1_1" (solid, pour order 88): 16.175,181.625 16.175,189.375 14.9,189.375 14.9,184.025 14.9,184 9.55,184 9.55,182.425 14.9,182.425 14.9,181.625
B6 on Top Layer "Top Layer-B6" (solid, pour order 124): 7.85,170 15.625,170 15.625,175 7.85,175
NetD2_BB1_1 on Top Layer "Top Layer-NetD2_BB1_1" (solid, pour order 24): 57.4,15.4 54.6,15.4 54.6,16.075 53.325,16.075 53.325,8.075 54.6,8.075 54.6,13.6 57.4,13.6
GND on Top Layer "Top Layer-GND 1" (solid, pour order 150): 8.3,40.325 8.3,32.784 12.525,32.784 12.525,38.575 19.1,38.575 19.1,40.325
NetD3_BB2_1 on Top Layer "Top Layer-NetD3_BB1_1" (solid, pour order 154): 16.175,29.625 16.175,37.375 14.9,37.375 14.9,32.025 14.9,32 9.55,32 9.55,30.425 14.9,30.425 14.9,29.625
NetD2_BB2_1 on Top Layer "Top Layer-NetD2_BB1_1" (solid, pour order 152): 57.4,39.4 54.6,39.4 54.6,40.075 53.325,40.075 53.325,32.075 54.6,32.075 54.6,37.6 57.4,37.6
NetD3_BB2_2 on Top Layer "Top Layer-NetD3_BB1_2" (solid, pour order 148): 33.45,25.525 17,25.525 17,37.375 24.575,37.375 24.575,32.825 33.4,32.825
NetD2_BB2_2 on Top Layer "Top Layer-NetD2_BB1_2" (solid, pour order 146): 52.5,32.025 52.5,44.425 36.9,44.425 36.9,37.025 45.2,37.025 45.2,32.025
NetD3_BB5_2 on Top Layer "Top Layer-NetD3_BB1_2" (solid, pour order 144): 33.45,149.525 17,149.525 17,161.375 24.575,161.375 24.575,156.825 33.4,156.825
NetD2_BB4_2 on Top Layer "Top Layer-NetD2_BB1_2" (solid, pour order 142): 52.5,132.025 52.5,144.425 36.9,144.425 36.9,137.025 45.2,137.025 45.2,132.025
NetD2_BB3_2 on Top Layer "Top Layer-NetD2_BB1_2" (solid, pour order 138): 52.5,56.025 52.5,68.425 36.9,68.425 36.9,61.025 45.2,61.025 45.2,56.025
NetD3_BB3_2 on Top Layer "Top Layer-NetD3_BB1_2" (solid, pour order 136): 33.45,49.525 17,49.525 17,61.375 24.575,61.375 24.575,56.825 33.4,56.825
NetD2_BB1_2 on Top Layer "Top Layer-NetD2_BB1_2" (solid, pour order 130): 52.5,8.025 52.5,20.425 36.9,20.425 36.9,13.025 45.2,13.025 45.2,8.025
NetD2_BB5_2 on Top Layer "Top Layer-NetD2_BB1_2" (solid, pour order 128): 52.5,156.025 52.5,168.425 36.9,168.425 36.9,161.025 45.2,161.025 45.2,156.025
NetD3_BB6_2 on Top Layer "Top Layer-NetD3_BB1_2" (solid, pour order 126): 33.45,177.525 17,177.525 17,189.375 24.575,189.375 24.575,184.825 33.4,184.825
NetD3_BB1_2 on Top Layer "Top Layer-NetD3_BB1_2" (solid, pour order 122): 33.45,1.525 17,1.525 17,13.375 24.575,13.375 24.575,8.825 33.4,8.825
GND on Top Layer "Top Layer-GND 1" (solid, pour order 54): 8.3,64.325 8.3,56.784 12.525,56.784 12.525,62.575 19.1,62.575 19.1,64.325
NetD2_BB6_1 on Top Layer "Top Layer-NetD2_BB1_1" (solid, pour order 86): 57.4,191.4 54.6,191.4 54.6,192.075 53.325,192.075 53.325,184.075 54.6,184.075 54.6,189.6 57.4,189.6
GND on Top Layer "Top Layer-GND 1" (solid, pour order 84): 8.3,192.325 8.3,184.784 12.525,184.784 12.525,190.575 19.1,190.575 19.1,192.325
NetD3_BB5_1 on Top Layer "Top Layer-NetD3_BB1_1" (solid, pour order 78): 16.175,153.625 16.175,161.375 14.9,161.375 14.9,156.025 14.9,156 9.55,156 9.55,154.425 14.9,154.425 14.9,153.625
NetD2_BB5_1 on Top Layer "Top Layer-NetD2_BB1_1" (solid, pour order 76): 57.4,163.4 54.6,163.4 54.6,164.075 53.325,164.075 53.325,156.075 54.6,156.075 54.6,161.6 57.4,161.6
GND on Top Layer "Top Layer-GND 1" (solid, pour order 74): 8.3,164.325 8.3,156.784 12.525,156.784 12.525,162.575 19.1,162.575 19.1,164.325
NetD3_BB4_2 on Top Layer "Top Layer-NetD3_BB1_2" (solid, pour order 70): 33.45,125.525 17,125.525 17,137.375 24.575,137.375 24.575,132.825 33.4,132.825
NetD3_BB4_1 on Top Layer "Top Layer-NetD3_BB1_1" (solid, pour order 68): 16.175,129.625 16.175,137.375 14.9,137.375 14.9,132.025 14.9,132 9.55,132 9.55,130.425 14.9,130.425 14.9,129.625
NetD2_BB4_1 on Top Layer "Top Layer-NetD2_BB1_1" (solid, pour order 66): 57.4,139.4 54.6,139.4 54.6,140.075 53.325,140.075 53.325,132.075 54.6,132.075 54.6,137.6 57.4,137.6
GND on Top Layer "Top Layer-GND 1" (solid, pour order 64): 8.3,140.325 8.3,132.784 12.525,132.784 12.525,138.575 19.1,138.575 19.1,140.325
NetD3_BB3_1 on Top Layer "Top Layer-NetD3_BB1_1" (solid, pour order 58): 16.175,53.625 16.175,61.375 14.9,61.375 14.9,56.025 14.9,56 9.55,56 9.55,54.425 14.9,54.425 14.9,53.625
NetD2_BB3_1 on Top Layer "Top Layer-NetD2_BB1_1" (solid, pour order 56): 57.4,63.4 54.6,63.4 54.6,64.075 53.325,64.075 53.325,56.075 54.6,56.075 54.6,61.6 57.4,61.6
GND on Top Layer "Top Layer-GND 1" (solid, pour order 30): 8.3,16.325 8.3,8.784 12.525,8.784 12.525,14.575 19.1,14.575 19.1,16.325
no net on Top Layer "Top Layer-No Net" (solid, pour order 28): 17.025,16.325
no net on Top Layer "Top Layer-No Net 1" (solid, pour order 22): 57.4,15.4
NetD3_BB1_1 on Top Layer "Top Layer-NetD3_BB1_1" (solid, pour order 14): 16.175,5.625 16.175,13.375 14.9,13.375 14.9,8.025 14.9,8 9.55,8 9.55,6.425 14.9,6.425 14.9,5.625
no net on Top Layer "Top Layer-No Net 2" (solid, pour order 12): 16.175,8.784
no net on Top Layer "Top Layer-No Net 3" (solid, pour order 4): 52.4,11.425
no net on Top Layer "Top Layer-No Net 4" (solid, pour order 2): 52.4,11.425
no net on Top Layer "Top Layer-No Net 5" (solid, pour order 0): 36.8,13.025
GND on Bottom Layer (solid, pour order 176): 46.7,85.8 52.6,85.8 52.6,92 46.7,92
GND on Bottom Layer (solid, pour order 172): 19.7,93.4 19.7,84.7 11,84.7 11,93.4
NetD2_BB6_2 on Bottom Layer "Top Layer-NetD2_BB1_2" (solid, pour order 94): 52.5,184.025 52.5,196.425 36.9,196.425 36.9,189.025 45.2,189.025 45.2,184.025
B6 on Bottom Layer "Signal Layer 1-B6" (solid, pour order 92): 7.85,170 14.475,170 14.475,175 7.85,175
NetD3_BB1_2 on Bottom Layer "Top Layer-NetD3_BB1_2" (solid, pour order 158): 33.45,25.525 17,25.525 17,37.375 24.575,37.375 24.575,32.825 33.4,32.825
NetD2_BB2_2 on Bottom Layer "Top Layer-NetD2_BB1_2" (solid, pour order 156): 52.5,32.025 52.5,44.425 36.9,44.425 36.9,37.025 45.2,37.025 45.2,32.025
NetD3_BB5_2 on Bottom Layer "Top Layer-NetD3_BB1_2" (solid, pour order 80): 33.45,149.525 17,149.525 17,161.375 24.575,161.375 24.575,156.825 33.4,156.825
NetD2_BB4_2 on Bottom Layer "Top Layer-NetD2_BB1_2" (solid, pour order 72): 52.5,132.025 52.5,144.425 36.9,144.425 36.9,137.025 45.2,137.025 45.2,132.025
NetD3_BB4_2 on Bottom Layer "Top Layer-NetD3_BB1_2" (solid, pour order 140): 33.45,125.525 17,125.525 17,137.375 24.575,137.375 24.575,132.825 33.4,132.825
NetD2_BB3_2 on Bottom Layer "Top Layer-NetD2_BB1_2" (solid, pour order 62): 52.5,56.025 52.5,68.425 36.9,68.425 36.9,61.025 45.2,61.025 45.2,56.025
NetD3_BB3_2 on Bottom Layer "Top Layer-NetD3_BB1_2" (solid, pour order 60): 33.45,49.525 17,49.525 17,61.375 24.575,61.375 24.575,56.825 33.4,56.825
NetD2_BB1_2 on Bottom Layer "Top Layer-NetD2_BB1_2" (solid, pour order 8): 52.5,8.025 52.5,20.425 36.9,20.425 36.9,13.025 45.2,13.025 45.2,8.025
NetD2_BB5_2 on Bottom Layer "Top Layer-NetD2_BB1_2" (solid, pour order 82): 52.5,156.025 52.5,168.425 36.9,168.425 36.9,161.025 45.2,161.025 45.2,156.025
NetD3_BB6_2 on Bottom Layer "Top Layer-NetD3_BB1_2" (solid, pour order 90): 33.45,177.525 17,177.525 17,189.375 24.575,189.375 24.575,184.825 33.4,184.825
NetD3_BB1_2 on Bottom Layer "Top Layer-NetD3_BB1_2" (solid, pour order 10): 33.45,1.525 17,1.525 17,13.375 24.575,13.375 24.575,8.825 33.4,8.825
GND on Signal Layer 1 "Signal Layer 1-No Net" (solid, pour order 120): 0,0 82,0 82,200 0,200

## Keep-outs
Keep-Out Layer:
  lines w0.1: -71.8,203.8 -47.8,203.8 ; -71.8,206.8 -47.775,206.8 ; 0,0 82,0 82,200 0,200 0,0

## Other copper
Top Layer:
  rectangle net GND: 68.5,106.9 71.6,109
  rectangle net GND: 70.8,110.7 71.65,114.2
  rectangle net GND: 68.5,110.7 70.9,115.3
  rectangle net GND: 59.7,106.9 63,117.8
  rectangle net GND: 13.4,94.1 14.286,97
  rectangle net GND: 18.5,98.8 20.7,100.4
  rectangle net GND: 58.175,7.625 66.625,15.6